# Altium PCB PCBen.PcbDoc
Units mm, origin at the board's own origin, x right, y up, seen from the top; angles counter-clockwise.
Board outline 175.29 x 83.64 mm, 2 copper layers (Top Layer, Bottom Layer); 21 components, 31 nets, 90 pads, 9 vias.
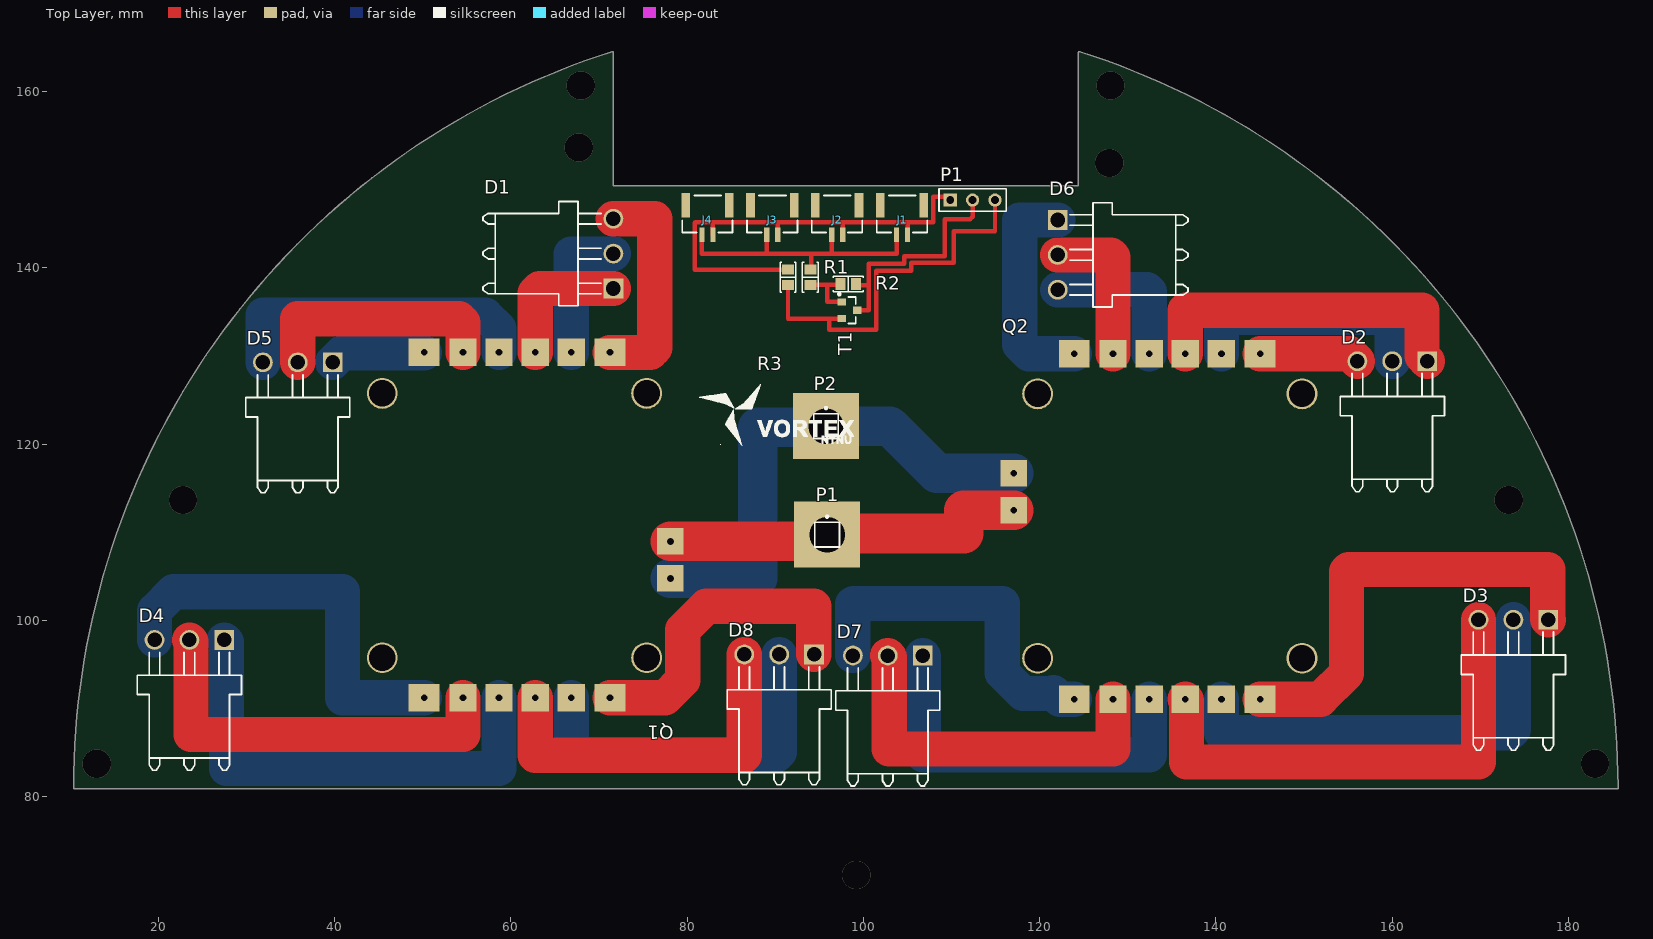
[diagram p0: Top Layer view]
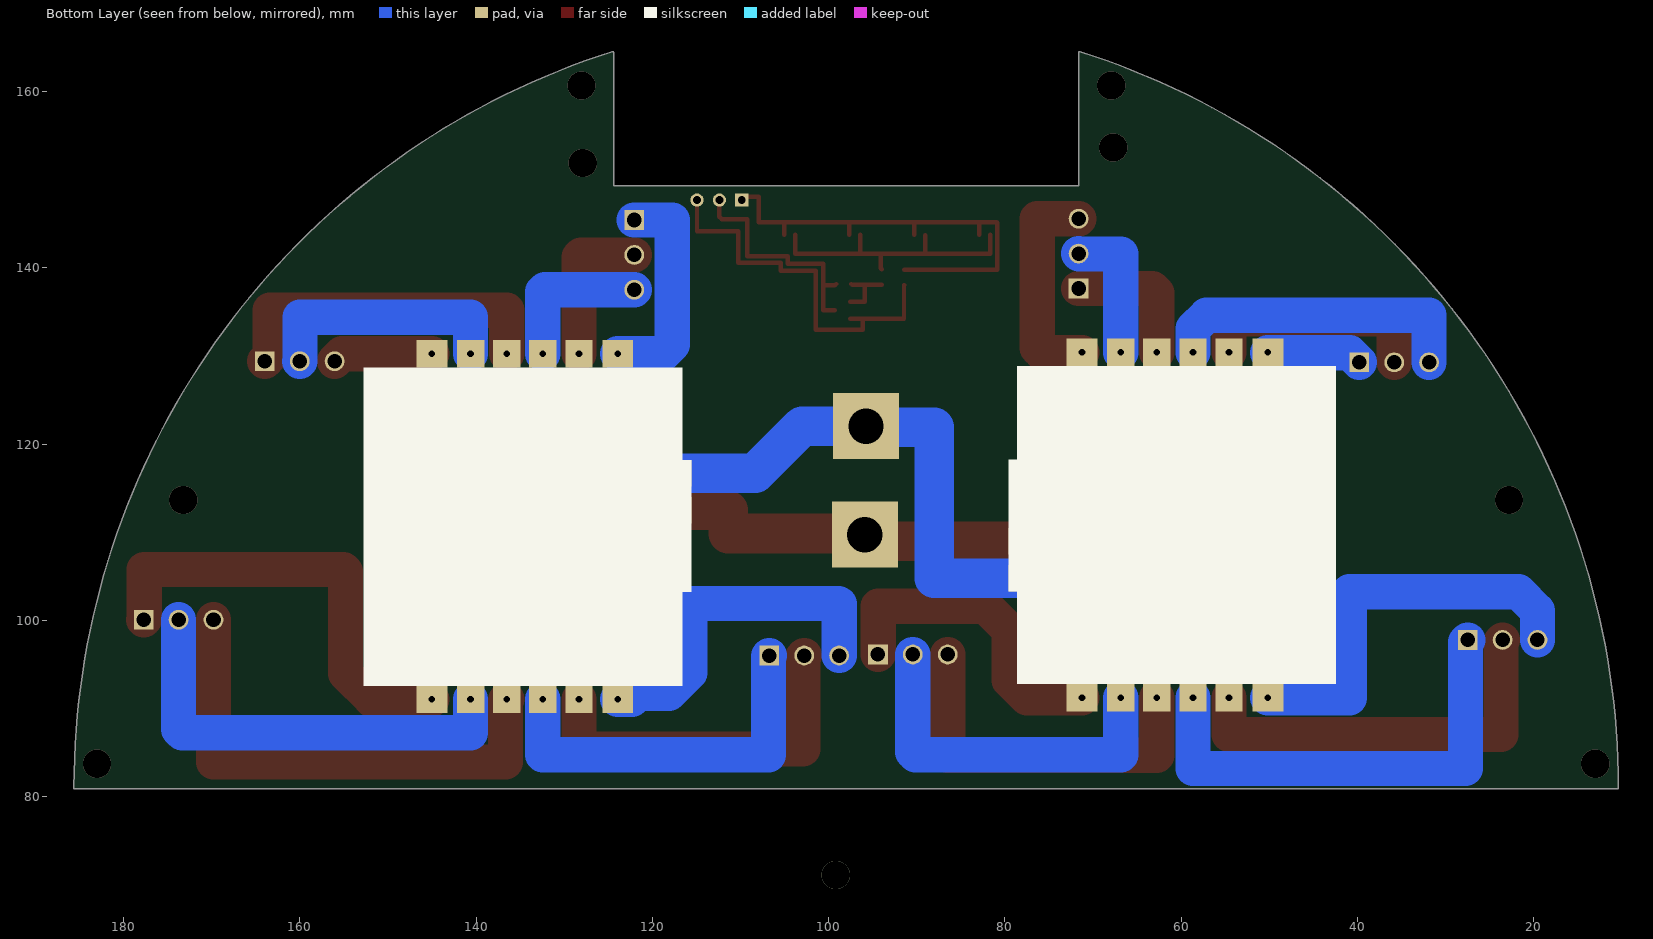
[diagram p1: Bottom Layer view, seen from below]
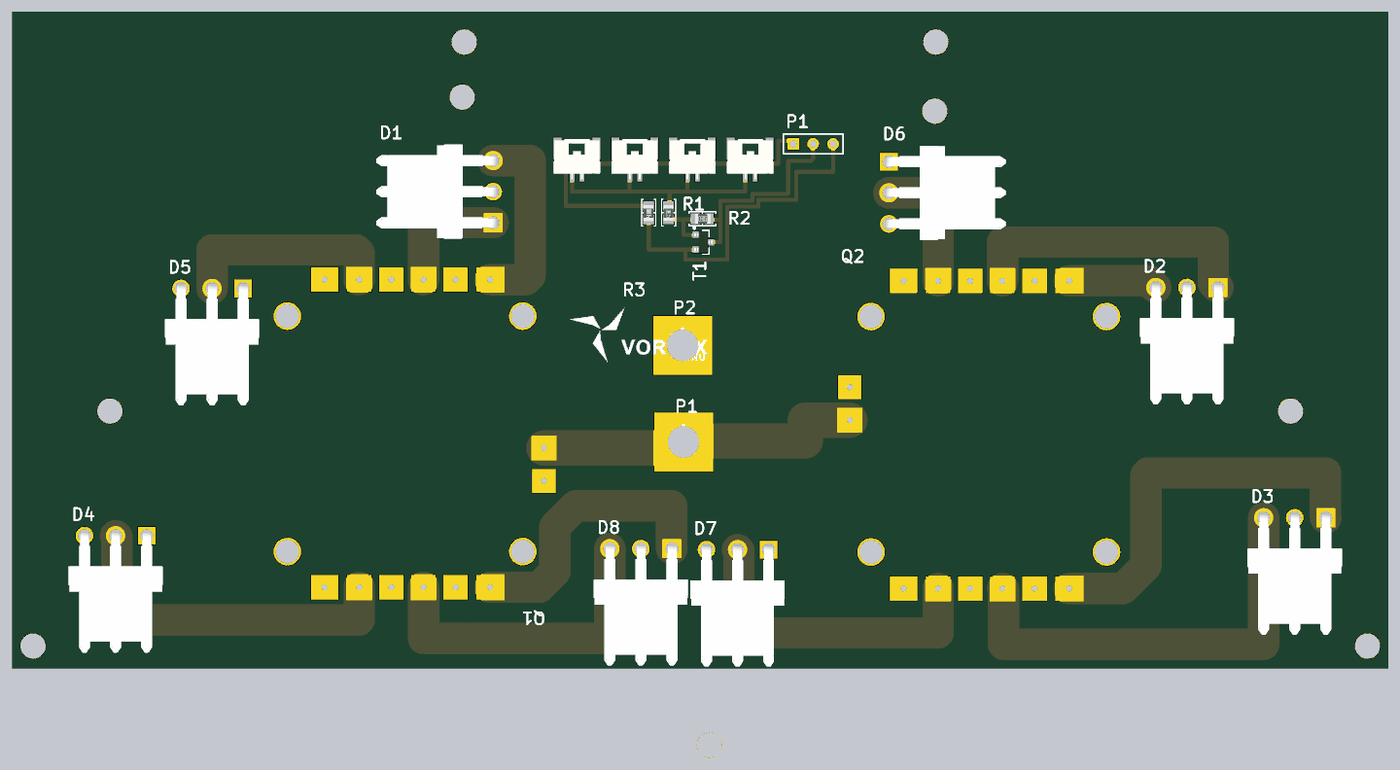
[diagram p2: 3D render of the assembled board from above, using the file's embedded part models]

## Layer stack, top to bottom
Top Solder: solder mask 0.0102, Solder Resist, Dk 3.5
Top Layer: signal copper 0.0711
Dielectric 1: dielectric 0.32, FR-4, Dk 4.8
Bottom Layer: signal copper 0.0711
Bottom Solder: solder mask 0.0102, Solder Resist, Dk 3.5

## Board outline
10.526,80.9 cw(c10.508,81.026) 10.381,81.026 cw(c98.008,81.026) 71.465,164.537 cw(c71.503,164.415) 71.627,164.446 cw(c71.508,164.4) 71.635,164.4 71.635,149.338 124.381,149.338 124.381,164.4 cw(c124.508,164.4) 124.391,164.451 cw(c124.513,164.415) 124.552,164.536 cw(c98.008,81.026) 185.635,81.115 cw(c185.544,81.026) 185.671,81.026 cw(c185.544,81.026) 185.544,80.899 10.544,80.899 cw(c10.544,81.026)

## Design rules (kind name [scope] priority, off if disabled: settings)
Clearance [All] p1: gap=0.254 ignorepadtopadclearanceinfootprint=FALSE except(0: Arc-Hole Track-Hole SMDPad-Hole THPad-Hole Via-Hole Fill-Hole Poly-Hole Region-Hole Text-Hole)
PolygonConnect [All] p1: connectstyle=Relief reliefconductorwidth=0.254 reliefentries=4 polygonreliefangle="90 Angle" airgapwidth=0.254
RoutingVias [All] p1: holewidth=0.711 width=1.27 viastyle="Through Hole" minholewidth=0.711 minwidth=1.27 maxholewidth=0.711 maxwidth=1.27
SolderMaskExpansion [All] p1: expansion=0.102
Width [All] p1: maxlimit=10 minlimit=0.254 preferedwidth=4 minimp=50.000000 maximp=50.000000 favimp=50.000000
30 further rules are at their usual default settings.

## Classes and differential pairs
component class Skjema: D1 D3 D4 D5 D6 D7 D8 J1 J2 J3 J4 P1 P2 Q1 R1 R2 R3 T1

## Components (designator, comment, footprint, x,y, rotation, side; value= is the part's Value field where it differs from the comment)
D1 "" JST_B3PS-VH(LF)(SN) 71.628,137.665 r90 top
D2 "" JST_B3PS-VH(LF)(SN) 163.98,129.413 r180 top
D3 "" JST_B3PS-VH(LF)(SN) 177.719,100.076 r180 top
D4 "" JST_B3PS-VH(LF)(SN) 27.478,97.79 r180 top
D5 "" JST_B3PS-VH(LF)(SN) 39.774,129.286 r180 top
D6 "" JST_B3PS-VH(LF)(SN) 122.047,145.438 r270 top
D7 "" JST_B3PS-VH(LF)(SN) 106.726,96.012 r180 top
D8 "" JST_B3PS-VH(LF)(SN) 94.407,96.139 r180 top
J1 "BM02B-GHS-TBT(LF)(SN)(N)" "JST BM02B-GHS-TBT" 104.384,146.201 r0 top
J2 "BM02B-GHS-TBT(LF)(SN)(N)" "JST BM02B-GHS-TBT" 97.018,146.201 r0 top
J3 "BM02B-GHS-TBT(LF)(SN)(N)" "JST BM02B-GHS-TBT" 89.672,146.201 r0 top
J4 "BM02B-GHS-TBT(LF)(SN)(N)" "JST BM02B-GHS-TBT" 82.306,146.201 r0 top
P1 "Vcc" PIN1 95.885,109.728 r0 top
P1 "Header 3" HDR1X3 109.855,147.701 r0 top
P2 "Gnd" PIN1 95.758,122.047 r0 top
Q1 "ESC for Vortex" "ESC - Org" 42.405,92.766 r0 top
Q2 "ESC for Vortex" "ESC - Org" 152.775,128.709 r180 top
R1 "1K" "RES 0805/2012" 93.98,138.952 r270 top value=0.0
R2 "27K" "RES 0805/2012" 98.284,138.176 r0 top value=0.0
R3 "1K" "RES 0805/2012" 91.44,138.938 r270 top value=0.0
T1 "1" "INFINEON SOT-23-3" 98.421,135.194 r0 top

## Footprints (in the part's own frame and the unit in brackets; to place one, negate y for a bottom-side part, rotate by r counter-clockwise, add the part's x,y. Pads: shape width x height; smd on the part's side, far side on the other; paste and mask are expansions set on the pad)
"ESC - Org" [mm]
  rect 3.5x3.1 hole 0.762: 1(7.75,37.65) 6(28.85,37.65) 7(7.75,-1.55) 12(28.85,-1.55)
  rect 3.1x3.1 hole 0.762: 2(12.15,37.65) 3(16.25,37.65) 4(20.35,37.65) 5(24.45,37.65) 8(12.15,-1.55) 9(16.25,-1.55) 10(20.35,-1.55) 11(24.45,-1.55)
  rect 3x3 hole 0.762: 13(35.7,16.2) 14(35.7,12)
  round 3.508 hole 3: 15(3,33) 16(3,3) 17(33,3) 18(33,33)
  silkscreen extent 3,33 3,33
HDR1X3 [mm] "Connector; Header; 3 Position"
  rect 1.5x1.5 hole 0.9: 1(0,0)
  round 1.5 hole 0.9: 2(2.54,0) 3(5.08,0)
  silkscreen extent -1.27,-1.27 6.35,1.27
"INFINEON SOT-23-3" [mm] "SOT23, 3-Leads, Body 2.90x2.40mm, Pitch 0.95mm, IPC Medium Density"
  rect 0.972x0.802 smd: 1(-0.885,0.95) 2(0.885,0) 3(-0.885,-0.95)
  silkscreen extent -1.27,-1.5 0.7,1.95, body extent -1.16,-1.45 1.16,1.45, height 1
"JST BM02B-GHS-TBT" [mm] "JST GH Series 1.25mm pitch, 4 pin top entry connector"
  rect 0.6x1.7 smd: 1(-0.625,-2.437) 2(0.625,-2.437)
  rect 1x2.8 smd: M(-2.475,0.913) M(2.475,0.913)
  silkscreen extent -2.87,-2.19 2.85,2.01, body extent -2.88,-2.99 2.87,1.96, height 4.18
JST_B3PS-VH(LF)(SN) [mm]
  rect 2.25x2.25 hole 1.65 mask+0.102: 22(0,0)
  round 2.25 hole 1.65 mask+0.102: 23(3.96,0) 24(7.92,0)
  silkscreen extent -1.95,1.4 9.87,14.8, body extent -1.97,-0.63 9.85,14.84, height 8.57
PIN1 [mm] "Connector; Plug"
  rect 7.5x7.5 hole 4: 1(0,0)
  silkscreen extent -1.4,-1.4 1.4,2.17
"RES 0805/2012" [mm] "Chip Resistor, 2-Leads, Body 2.00x1.25mm, IPC Medium Density"
  rect 1.15x1.35 smd: 1(-0.875,0) 2(0.875,0)
  silkscreen extent -1.7,-0.9 1.7,0.9, body extent -0.95,-0.62 1.05,0.63, height 0.6

## Part data
D1 D2 D3 D4 D5 D6 D7 D8: library part Connect?
J1 J2 J3 J4: "CONN HEADER GH TOP 2POS 1.25MM", Colour=Natural, Manufacturer="JST Sales America Inc.", Supplier Part Number 1=455-1578-2-ND, ComponentLink1Description=Datasheet, ComponentLink1URL=http://www.jst-mfg.com/product/pdf/eng/eGH.pdf, ComponentLink2Description="Digi-Key Listing", ComponentLink2URL=http://www.digikey.ca/product-detail/en/BM02B-GHS-TBT(LF)(SN)(N)/455-1578-2-ND/807800, Contact Finish=Tin, Fastening Type="Locking Ramp", Number Of Positions=2, Number Of Rows=1, PartId=7816, Part Number=BM02B-GHS-TBT(LF)(SN)(N), Pitch="0.049\" (1.25mm)", Price=0,2297, Series=GH, Supplier 1=Digi-Key, Type="Surface Mount"
P1 P2: library part Plug, "Plug", LatestRevisionDate=17-Jul-2002, LatestRevisionNote="Re-released for DXP Platform.", Publisher="Altium Limited"
P1: "Header, 3-Pin", LatestRevisionDate=17-Jul-2002, LatestRevisionNote="Re-released for DXP Platform.", Publisher="Altium Limited"
Q1 Q2: library part ESC
R1 R2 R3: library part RC0805JR-070RL, "RES SMD 0.0 OHM JUMPER 1/8W 0805", Device Package="0805 (2012 Metric)", Manufacturer=Yageo, PowerRating="0.125W, 1/8W", Supplier Part Number 1=311-0.0ARTR-ND, TemperatureRange="-55C ~ 155C", Tolerance=Jumper, ComponentLink1Description=Datasheet, ComponentLink1URL=http://www.yageo.com/documents/recent/PYu-RC_Group_51_RoHS_L_04.pdf, ComponentLink2Description="Digi-Key Listing", ComponentLink2URL=https://www.digikey.com/product-detail/en/yageo/RC0805JR-070RL/311-0.0ARTR-ND/728216, PartId=16144, Part Number=RC0805JR-070RL, Price=0,0031, Supplier 1=Digi-Key
T1: library part "BSS308PE H6327", "MOSFET P-CH 30V 2A SOT23", Current Continuous Drain="2A (Ta)", Device Package="TO-236-3, SC-59, SOT-23-3", Drain to Source Voltage (Vdss)=30V, Input Capacitance (Ciss) at Vds="500pF @ 15V", Manufacturer="Infineon Technologies", Power - Max=500mW, Supplier Part Number 1="BSS308PE H6327TR-ND", ComponentLink1Description=Datasheet, ComponentLink1URL=http://www.infineon.com/dgdl/BSS308PE_Rev2.03.pdf?folderId=db3a304314dca38901154a72e3951a65&fileId=db3a304330f686060131099c80400073, ComponentLink2Description="Digi-Key Listing", ComponentLink2URL=http://www.digikey.com/product-detail/en/BSS308PE%20H6327/BSS308PE%20H6327TR-ND/2783466, Features="Logic Level Gate, 4.5V Drive", Gate Charge (Qg)="5nC @ 10V", PartId=8163, Part Number="BSS308PE H6327", Price=0,0819, Rds On (Max) at Id, Vgs="80 mOhm @ 2A, 10V", Supplier 1=Digi-Key, Type="MOSFET P-Channel, Metal Oxide", Vgs(th) (Max) at Id="1V @ 11uA"

## Via types
v1: diameter 3.2, hole 3.2, Top Layer to Bottom Layer, 9 vias

## Nets (pads, with @x,y where several pads share a name; then routed paths per layer and width w, separated by ;. In a path a pad name is that pad's centre, name@x,y a point inside that pad or via, vN(x,y) a via of type N, cw(c..) or ccw(c..) an arc to the next point about the centre after c; other vN are vias at no path point)
+5: P1.2 R2.2 T1.2 | length 26.9
  Top Layer w0.508: R2.2 99.286,138.049 100.584,138.049 ; T1.2 100.584,135.194 100.584,138.049 ; P1.2 112.395,145.796 112.141,145.542 109.22,145.542 109.22,141.351 104.648,141.351 104.648,140.462 100.584,140.462 100.584,138.049
GND: J1.2 J2.2 J3.2 J4.2 P1.1@109.855,147.701 R3.1 | length 53.8
  Top Layer w0.508: J4.2 82.931,145.206 ; J3.2 90.297,145.161 90.252,145.206 ; R3.1 80.873,139.813 80.873,145.135 80.944,145.206 82.931,145.206 ; J2.2 97.663,143.784 97.663,145.206 ; J1.2 105.009,145.028 104.831,145.206 ; P1.1@109.855,147.701 109.474,148.082 107.95,148.082 107.95,145.206 104.831,145.206 ; 82.931,145.206 90.252,145.206 ; 90.252,145.206 97.663,145.206 ; 97.663,145.206 104.831,145.206
NetD1_22: D1.22 Q1.4 | length 15.8
  Top Layer w4: Q1.4 62.755,137.143 63.277,137.665 D1.22
NetD1_23: D1.23 Q1.5 | length 16
  Bottom Layer w4: Q1.5 66.855,141.572 71.575,141.572 D1.23
NetD1_24: D1.24 Q1.6 | length 24.6
  Top Layer w4: Q1.6 75.806,130.416 76.327,130.937 76.327,145.585 D1.24
NetD2_22: D2.22 Q2.9 | length 37.8
  Top Layer w4: Q2.9 136.525,135.194 163.388,135.194 163.388,130.824 163.399,130.813 163.399,129.994 D2.22
NetD2_23: D2.23 Q2.8 | length 28.5
  Bottom Layer w4: Q2.8 140.625,134.402 159.984,134.402 159.984,129.449 D2.23
NetD2_24: D2.24 Q2.7 | length 11.4
  Top Layer w4: Q2.7 155.214,130.259 D2.24
NetD3_22: D3.22 Q2.1 | length 51.3
  Top Layer w4: Q2.1 151.892,91.059 154.813,93.98 154.813,105.537 155.067,105.791 177.673,105.791 177.673,100.122 D3.22
NetD3_23: D3.23 Q2.2 | length 49.5
  Bottom Layer w4: Q2.2 140.625,87.249 173.355,87.249 173.759,87.653 D3.23
NetD3_24: D3.24 Q2.3 | length 56.4
  Top Layer w4: Q2.3 136.652,90.932 136.652,83.947 169.799,83.947 D3.24
NetD4_22: D4.22 Q1.9 | length 53.6
  Bottom Layer w4: D4.22 27.713,97.555 27.713,83.204 58.655,83.204 Q1.9
NetD4_23: D4.23 Q1.8 | length 45.8
  Top Layer w4: D4.23 23.7,97.608 23.7,87.05 54.555,87.05 Q1.8
NetD4_24: D4.24 Q1.7 | length 46.8
  Bottom Layer w4: D4.24 19.558,101.092 21.717,103.251 40.894,103.251 40.894,91.216 Q1.7
NetD5_22: D5.22 Q1.1 | length 10.8
  Bottom Layer w4: D5.22 40.854,130.366 Q1.1@50.155,130.366
NetD5_23: D5.23 Q1.2 | length 27.2
  Top Layer w4: D5.23 35.814,134.22 54.121,134.22 54.555,133.786 Q1.2
NetD5_24: D5.24 Q1.3 | length 35.4
  Bottom Layer w4: D5.24 31.854,134.62 57.131,134.62 58.655,133.096 Q1.3
NetD6_22: D6.22 Q2.12 | length 25.1
  Bottom Layer w4: D6.22 117.729,145.438 117.729,131.321 118.791,130.259 Q2.12
NetD6_23: D6.23 Q2.11 | length 17.3
  Top Layer w4: D6.23 128.071,141.478 128.325,141.224 Q2.11
NetD6_24: D6.24 Q2.10 | length 17.5
  Bottom Layer w4: D6.24 132.194,137.518 132.425,137.287 Q2.10
NetD7_22: D7.22 Q2.4 | length 43.2
  Bottom Layer w4: D7.22 106.817,95.921 106.817,84.745 132.425,84.745 Q2.4
NetD7_23: D7.23 Q2.5 | length 41.7
  Top Layer w4: D7.23 102.948,95.83 102.948,85.399 128.325,85.399 Q2.5
NetD7_24: D7.24 Q2.6 | length 40.3
  Bottom Layer w4: D7.24 98.806,101.854 98.876,101.924 115.767,101.924 115.767,94.049 118.115,91.701 121.547,91.701 121.547,91.813 122.301,91.059 Q2.6
NetD8_22: D8.22 Q1.12 | length 36.2
  Top Layer w4: Q1.12 77.5,91.216 79.502,93.218 79.502,98.933 82.169,101.6 94.361,101.6 94.361,96.185 D8.22
NetD8_23: D8.23 Q1.11 | length 41.2
  Bottom Layer w4: Q1.11 66.855,84.762 90.14,84.762 90.447,85.069 D8.23
NetD8_24: D8.24 Q1.10 | length 41.7
  Top Layer w4: Q1.10 62.755,84.709 86.487,84.709 D8.24
NetJ1_1: J1.1 J2.1 J3.1 J4.1 R1.1 | length 32.5
  Top Layer w0.254: J3.1@89.007,143.724 J3.1
  Top Layer w0.508: J4.1 81.681,141.625 89.007,141.625 ; J3.1@89.007,143.724 89.007,141.625 ; R1.1 94.107,139.954 94.107,141.625 ; J2.1 96.393,141.625 ; J1.1 103.759,141.625 96.393,141.625 ; 89.007,141.625 94.107,141.625 ; 94.107,141.625 96.393,141.625
NetP1_1: P1.1@95.885,109.728 Q1.13 Q2.13 | length 42
  Top Layer w4.5: Q1.13 95.123,108.966 95.885,109.728 96.025,109.868 111.392,109.868 111.392,112.509 Q2.13
NetP1_3: P1.3 R3.2 T1.3 | length 44.7
  Top Layer w0.508: R3.2 91.445,138.058 91.445,134.239 96.139,134.239 ; T1.3 96.144,134.244 96.139,134.239 ; P1.3 114.935,144.145 110.236,144.145 110.236,140.589 105.41,140.589 105.41,139.7 101.473,139.7 101.473,132.969 96.139,132.969 96.139,134.239
NetP2_1: P2.1 Q1.14 Q2.14 | length 58.4
  Bottom Layer w4.5: Q1.14 88.02,104.766 88.02,121.929 95.64,121.929 P2.1 102.997,122.047 108.335,116.709 Q2.14
NetR1_2: R1.2 R2.1 T1.1 | length 7.1
  Top Layer w0.508: R1.2 95.885,138.077 ; R2.1 97.31,138.077 95.885,138.077 ; T1.1 95.885,136.144 95.885,138.077
pads on no net: J1.M J2.M J3.M J4.M Q1.15 Q1.16 Q1.17 Q1.18 Q2.15 Q2.16 Q2.17 Q2.18
copper on no net:
  other v1: 99.187,71.12 13,83.728 183.024,83.728 22.8,113.665 173.228,113.665 127.889,151.892 67.691,153.67 67.937,160.694 128.024,160.694

## Silkscreen, mask and mechanical layers (free items; w line width, h text height)
Top Overlay:
  drawing of 1208 lines, arcs and shapes, not listed
Drill Drawing:
  lines w0.254: 10.508,81.026 cw(c98.008,81.026) 71.503,164.415 ; 10.544,81.026 185.544,81.026 ; 71.508,164.4 71.508,149.211 124.508,149.211 124.508,164.4 ; 124.513,164.415 cw(c98.008,81.026) 185.508,81.026